# EAGLE board ds-digits2 (EAGLE 5.11)
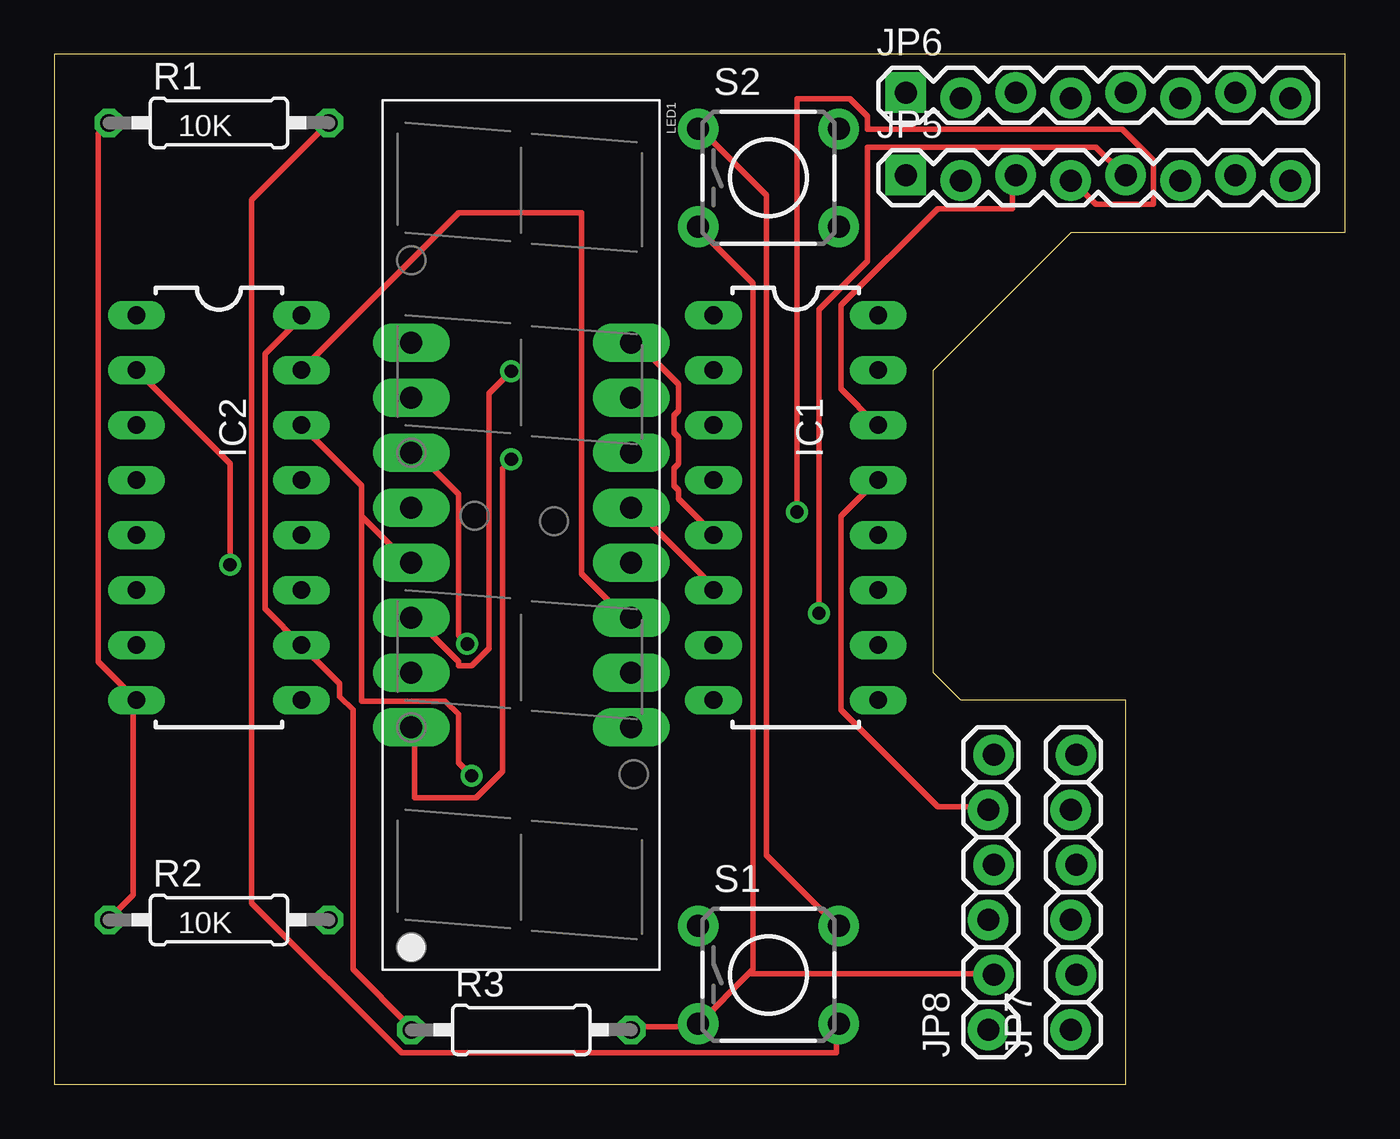
[diagram p0: board, top side]
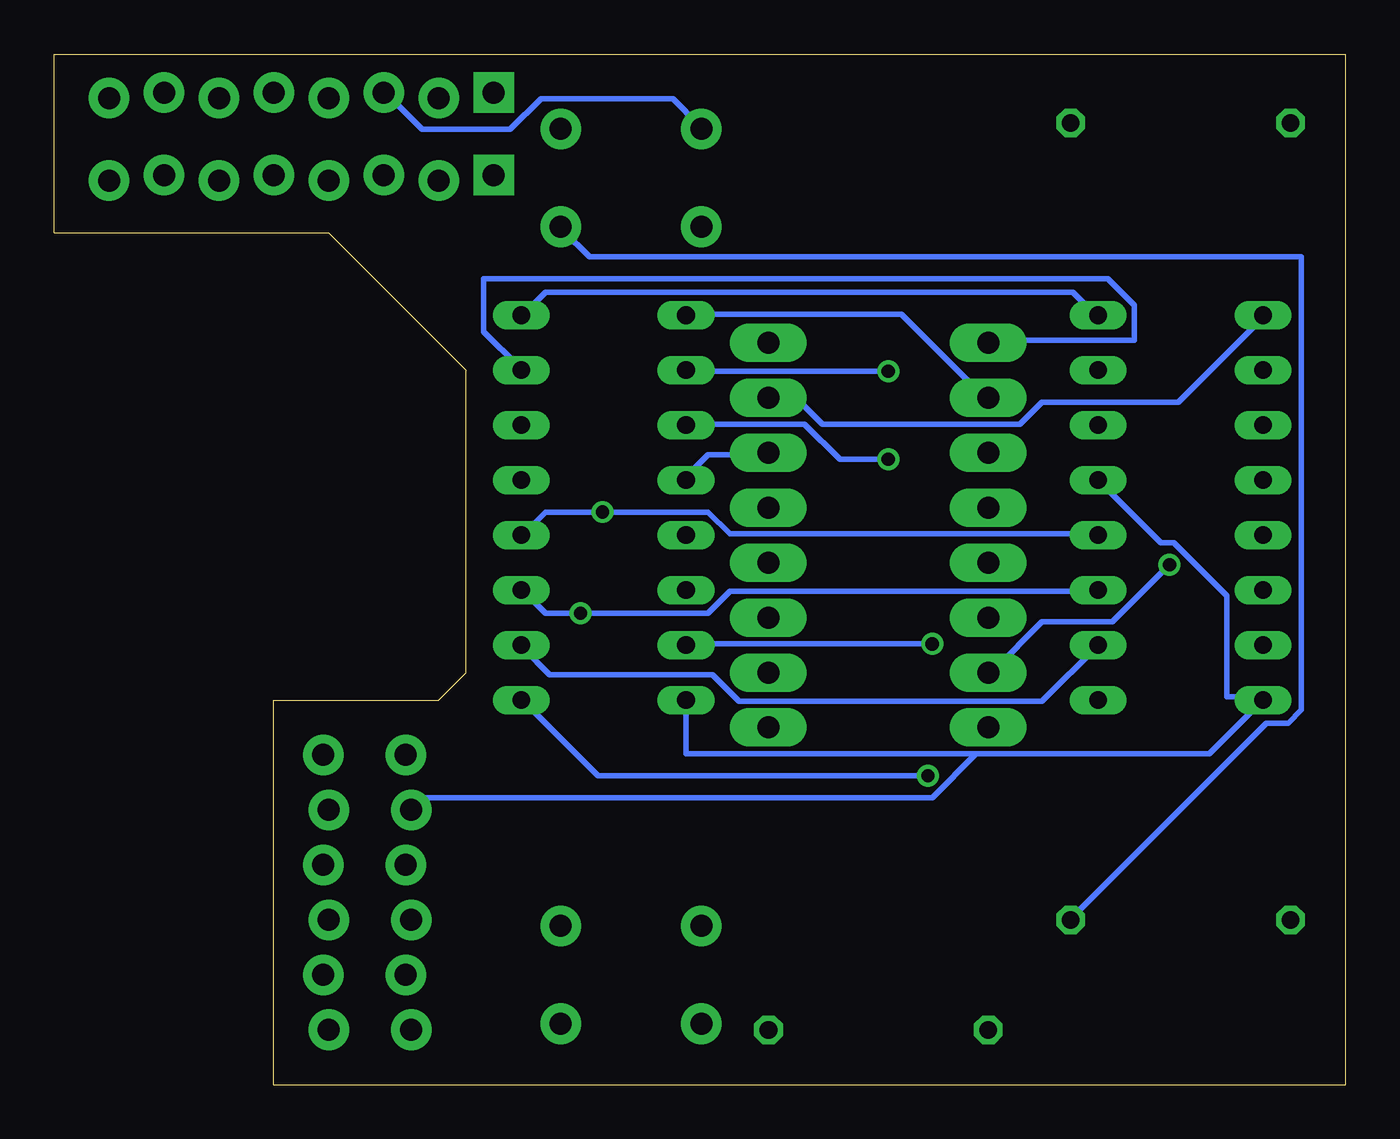
[diagram p1: board, bottom side, seen from below]

Size 59.69 x 47.62 mm. Coordinates in mm from the lower left corner, seen from the top.
Outline: 0,46.98 0,0 49.53,0 49.53,17.78 41.91,17.78 40.64,19.05 40.64,33.02 46.99,39.37 59.69,39.37 59.69,47.62 0,47.62 0,46.99
Copper layers (1*16): Top 0.035mm / dielectric 1.5mm / Bottom 0.035mm
Design rules "default": minimum track width 10mil, minimum drill 24mil, track to track 8mil, track to pad 8mil, pad to pad 8mil, via to via 8mil, smd to smd 8mil, copper to edge 40mil, drill to drill 8mil, minimum pad ring 10mil, minimum via ring 8mil, stop-mask expansion 4mil, vias tented up to drill 0mil, thermal gap 10mil

## Footprints (pad centres in the part's own frame; a part is rotated, then mirrored left to right if it is on the bottom)
DIL16 = drill 0.813 long: 1 -8.89,-3.81; 2 -6.35,-3.81; 3 -3.81,-3.81; 4 -1.27,-3.81; 5 1.27,-3.81; 6 3.81,-3.81; 7 6.35,-3.81; 8 8.89,-3.81; 9 8.89,3.81; 10 6.35,3.81; 11 3.81,3.81; 12 1.27,3.81; 13 -1.27,3.81; 14 -3.81,3.81; 15 -6.35,3.81; 16 -8.89,3.81
1X08_LOCK = drill 1.016 pad 1.88 square: 1 0,0.127 | drill 1.016 pad 1.88 round: 2 2.54,-0.127; 3 5.08,0.127; 4 7.62,-0.127; 5 10.16,0.127; 6 12.7,-0.127; 7 15.24,0.127; 8 17.78,-0.127
1X06_LOCK = drill 1.016 pad 1.88 round: 1 0,0; 2 2.54,-0.254; 3 5.08,0; 4 7.62,-0.254; 5 10.16,0; 6 12.7,-0.254
7-SEGMENT-4DIGIT-YOUNGSUN-LONGPADS = drill 1.016 pad 1.778 long: 1 -8.89,-5.08; 2 -6.35,-5.08; 3 -3.81,-5.08; 4 -1.27,-5.08; 5 1.27,-5.08; 6 3.81,-5.08; 7 6.35,-5.08; 8 8.89,-5.08; 9 8.89,5.08; 10 6.35,5.08; 11 3.81,5.08; 12 1.27,5.08; 13 -1.27,5.08; 14 -3.81,5.08; 15 -6.35,5.08; 16 -8.89,5.08
0207/10 = drill 0.813 octagon: 1 -5.08,0; 2 5.08,0
TACTILE-PTH = drill 1.016 pad 1.88 round: 1 -3.251,2.261; 2 3.251,2.261; 3 -3.251,-2.261; 4 3.251,-2.261

## Placement (x,y rotation side)
IC1  74LS595N  [DIL16]  34.29,26.67 270 top
IC2  74LS595N  [DIL16]  7.62,26.67 270 top
JP5  [1X08_LOCK]  39.37,41.91 0 top
JP6  [1X08_LOCK]  39.37,45.72 0 top
JP7  [1X06_LOCK]  46.99,2.54 90 top
JP8  [1X06_LOCK]  43.18,2.54 90 top
LED1  7-SEGMENT-4DIGIT-YOUNGSUNLONGPADS  [7-SEGMENT-4DIGIT-YOUNGSUN-LONGPADS]  21.59,25.4 270 top
R1  10K  [0207/10]  7.62,44.45 0 top
R2  10K  [0207/10]  7.62,7.62 0 top
R3  38  [0207/10]  21.59,2.54 0 top
S1  [TACTILE-PTH]  33.02,5.08 0 top
S2  [TACTILE-PTH]  33.02,41.91 0 top

## Library data of the parts
IC1 IC2 JP5-JP8 LED1 S1 S2 = SparkFun
R1-R3 = rcl

## Nets
GND: IC1.8 IC1.13 IC2.8 IC2.13 JP8.5 R1.1 R2.1
N$1: R2.2 S2.4
N$2: R1.2 S1.4
N$3: JP8.2 R3.2 S1.3 S2.3
N$5: JP6.3 S1.2 S2.1
N$7: JP6.1
N$8: JP5.8
N$9: JP5.7
N$10: JP8.3
N$11: JP8.4
N$13: IC1.15 LED1.1
N$14: IC1.1 LED1.2
N$15: IC1.2 LED1.6
N$16: IC1.14 JP5.3
N$17: IC1.9 IC2.14 LED1.5
N$18: IC1.12 IC2.12 JP5.4
N$19: IC1.11 IC2.11 JP5.5
N$20: IC1.3 LED1.8
N$21: IC1.4 LED1.14
N$22: JP5.1
N$23: IC1.5 LED1.16
N$24: IC1.6 LED1.13
N$25: IC1.7 LED1.3
N$26: IC2.15 LED1.11
N$27: IC2.1 LED1.15
N$28: JP7.1
N$29: IC2.2 LED1.7
N$30: JP5.2
N$37: JP5.6
N$38: JP6.2
N$41: JP6.5
N$42: JP6.6
N$43: JP6.7
N$44: JP6.8
N$45: JP7.6
N$46: JP7.5
N$47: JP7.4
N$48: JP7.3
N$49: JP7.2
N$50: JP8.6
N$53: JP8.1
VCC: IC1.10 IC1.16 IC2.10 IC2.16 R3.1

## Tracks (layer width: path | path; a pad name or v marks a point on that pad's centre or on a via)
GND
  Top 0.254: IC1.13 38,27.89 36.37,26.26 36.37,17.32 40.84,12.85 43.08,12.85 JP8.5 | R2.1 2.64,7.77 3.66,8.79 3.66,17.73 IC2.8 2.03,19.56 2.03,43.94 R1.1
  Bottom 0.254: 17.07,15.29 6.3,15.29 IC2.8 3.86,17.93 5.49,17.93 5.49,22.61 7.92,25.04 8.53,25.04 IC2.13 | 17.07,15.29 30.48,15.29 IC1.8 | 17.07,15.29 19.1,13.26 42.67,13.26 43.08,12.85 JP8.5
N$1
  Bottom 0.254: R2.2 12.6,7.77 3.66,16.71 2.64,16.71 2.03,17.32 2.03,38.25 34.95,38.25 36.17,39.47 S2.4
N$2
  Top 0.254: R1.2 9.14,40.89 9.14,8.38 16.05,1.47 36.17,1.47 36.17,2.69 S1.4
N$3
  Top 0.254: R3.2 26.82,2.69 29.67,2.69 S1.3 29.87,2.9 32.11,5.13 | 32.11,5.13 32.31,5.33 32.31,37.03 29.87,39.47 S2.3 | 32.11,5.13 43.28,5.13 JP8.2
N$5
  Top 0.254: S1.2 36.17,7.37 32.92,10.62 32.92,41.1 29.87,44.15 S2.1
  Bottom 0.254: S2.1 29.87,44.35 31.09,45.57 37.19,45.57 38.61,44.15 42.67,44.15 44.3,45.77 JP6.3
N$13
  Bottom 0.254: IC1.15 38.2,33.17 39.83,34.8 39.83,37.24 10.97,37.24 9.75,36.02 9.75,34.39 16.46,34.39 LED1.1
N$14
  Bottom 0.254: IC1.1 30.48,35.61 20.52,35.61 16.66,31.75 LED1.2
N$15  (via drill 0.61)
  Top 0.254: v21.13,32.97 20.12,31.95 20.12,20.17 19.3,19.36 18.69,19.36 18.69,19.56 16.66,21.59 LED1.6
  Bottom 0.254: v21.13,32.97 30.48,32.97 IC1.2
N$16
  Top 0.254: IC1.14 38,30.53 36.37,32.16 36.37,36.02 40.84,40.49 44.3,40.49 44.3,41.91 JP5.3
N$17  (via drill 0.61)
  Top 0.254: 14.22,26.26 14.22,27.69 IC2.14 | 14.22,26.26 16.46,24.03 LED1.5 | v19.3,14.28 18.69,14.88 18.69,17.12 18.09,17.73 14.22,17.73 14.22,26.26
  Bottom 0.254: v19.3,14.28 34.54,14.28 38,17.73 IC1.9
N$18  (via drill 0.61)
  Top 0.254: v34.34,26.47 34.34,45.57 36.78,45.57 37.59,44.76 37.59,44.15 49.38,44.15 50.8,42.72 50.8,40.69 48.16,40.69 47.14,41.71 JP5.4
  Bottom 0.254: IC2.12 11.58,25.45 28.45,25.45 29.46,26.47 v34.34,26.47 36.98,26.47 38,25.45 IC1.12
N$19  (via drill 0.61)
  Top 0.254: v35.36,21.79 35.36,35.81 37.59,38.05 37.59,43.33 48.16,43.33 49.38,42.11 JP5.5
  Bottom 0.254: IC2.11 11.58,22.81 28.45,22.81 29.46,21.79 v35.36,21.79 36.98,21.79 38,22.81 IC1.11
N$20  (via drill 0.61)
  Top 0.254: v21.13,28.91 20.73,28.5 20.73,14.48 19.51,13.26 16.66,13.26 16.66,16.51 LED1.8
  Bottom 0.254: v21.13,28.91 23.37,28.91 24.99,30.53 30.48,30.53 IC1.3
N$21
  Bottom 0.254: IC1.4 30.48,28.09 29.46,29.11 26.82,29.11 LED1.14
N$23
  Top 0.254: IC1.5 30.48,25.45 28.85,27.08 28.85,27.48 28.65,27.69 28.65,28.5 28.85,28.7 28.85,29.92 28.65,30.12 28.65,30.94 28.85,31.14 28.85,32.36 26.82,34.39 LED1.16
N$24
  Top 0.254: IC1.6 30.48,23.01 26.82,26.67 LED1.13
N$25  (via drill 0.61)
  Top 0.254: v19.1,20.37 18.69,20.78 18.69,27.28 16.66,29.31 LED1.3
  Bottom 0.254: v19.1,20.37 30.48,20.37 IC1.7
N$26
  Top 0.254: IC2.15 18.69,40.28 24.38,40.28 24.38,23.62 26.42,21.59 LED1.11
N$27
  Bottom 0.254: IC2.1 3.86,35.41 7.72,31.55 14.02,31.55 15.04,30.53 24.18,30.53 25.4,31.75 LED1.15
N$29  (via drill 0.61)
  Top 0.254: v8.13,24.03 8.13,28.7 IC2.2
  Bottom 0.254: v8.13,24.03 10.77,21.39 14.02,21.39 16.26,19.15 16.46,19.15 LED1.7
VCC
  Top 0.254: R3.1 16.46,2.69 13.82,5.33 13.82,17.32 13.21,17.93 13.21,18.54 IC2.10 9.75,22 9.75,33.78 11.38,35.41 IC2.16
  Bottom 0.254: IC1.10 38,20.17 36.78,18.95 29.26,18.95 28.04,17.73 14.02,17.73 IC2.10 | IC1.16 38,35.61 36.98,36.63 12.6,36.63 11.58,35.61 IC2.16

## Text on the board
tPlace: 10K | 10K